# Altium PCB ZR-3922-MB-V1.0.PcbDoc
Units mm, origin at the board's own origin, x right, y up, seen from the top; angles counter-clockwise.
Board outline 65 x 40 mm, 2 copper layers (Top Layer, Bottom Layer); 255 components, 175 nets, 803 pads, 0 vias.
Unrouted connection lines stored in the file: 538.
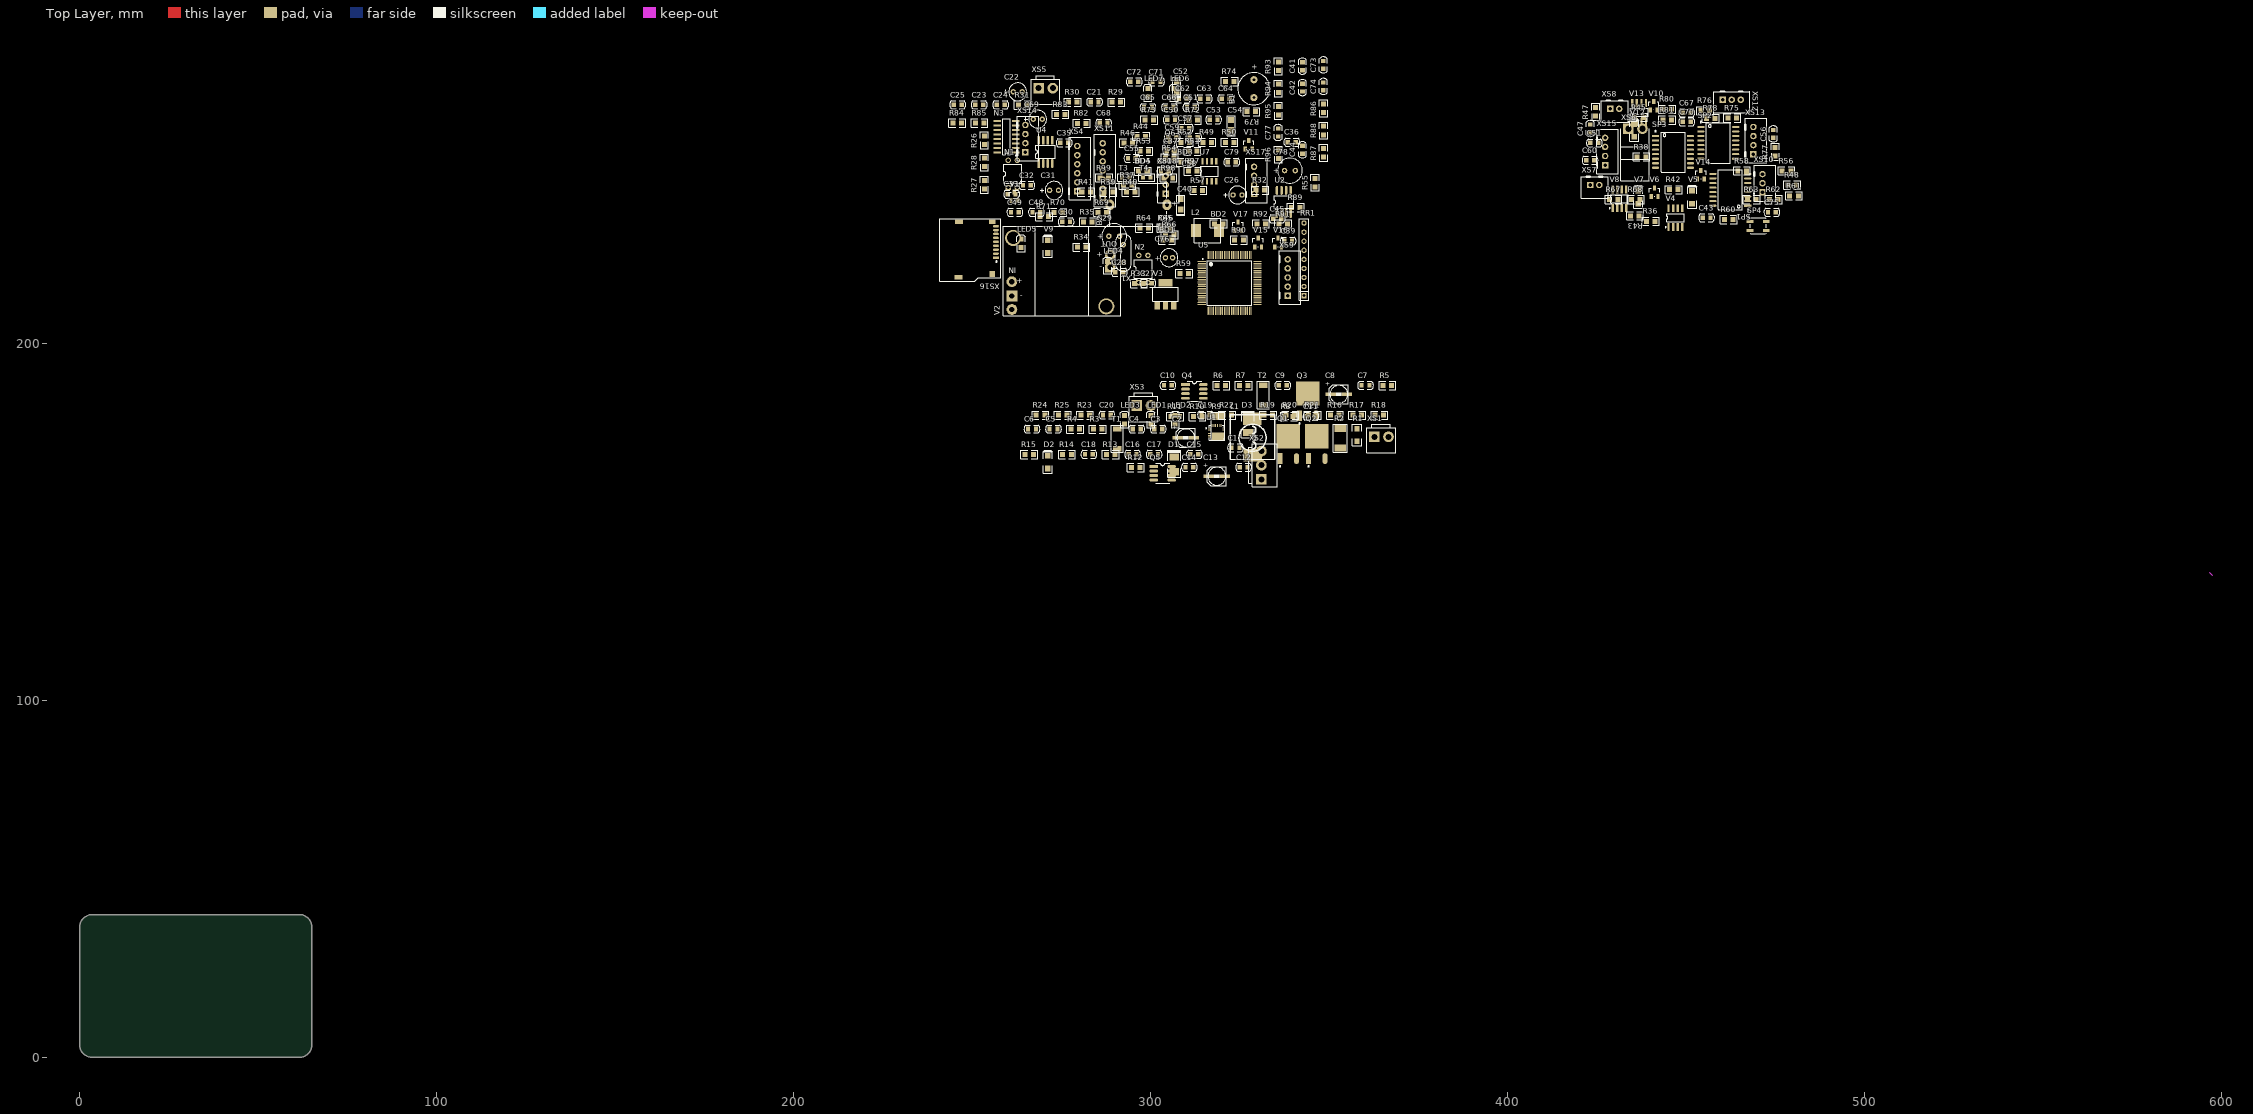
[diagram p0: Top Layer view]
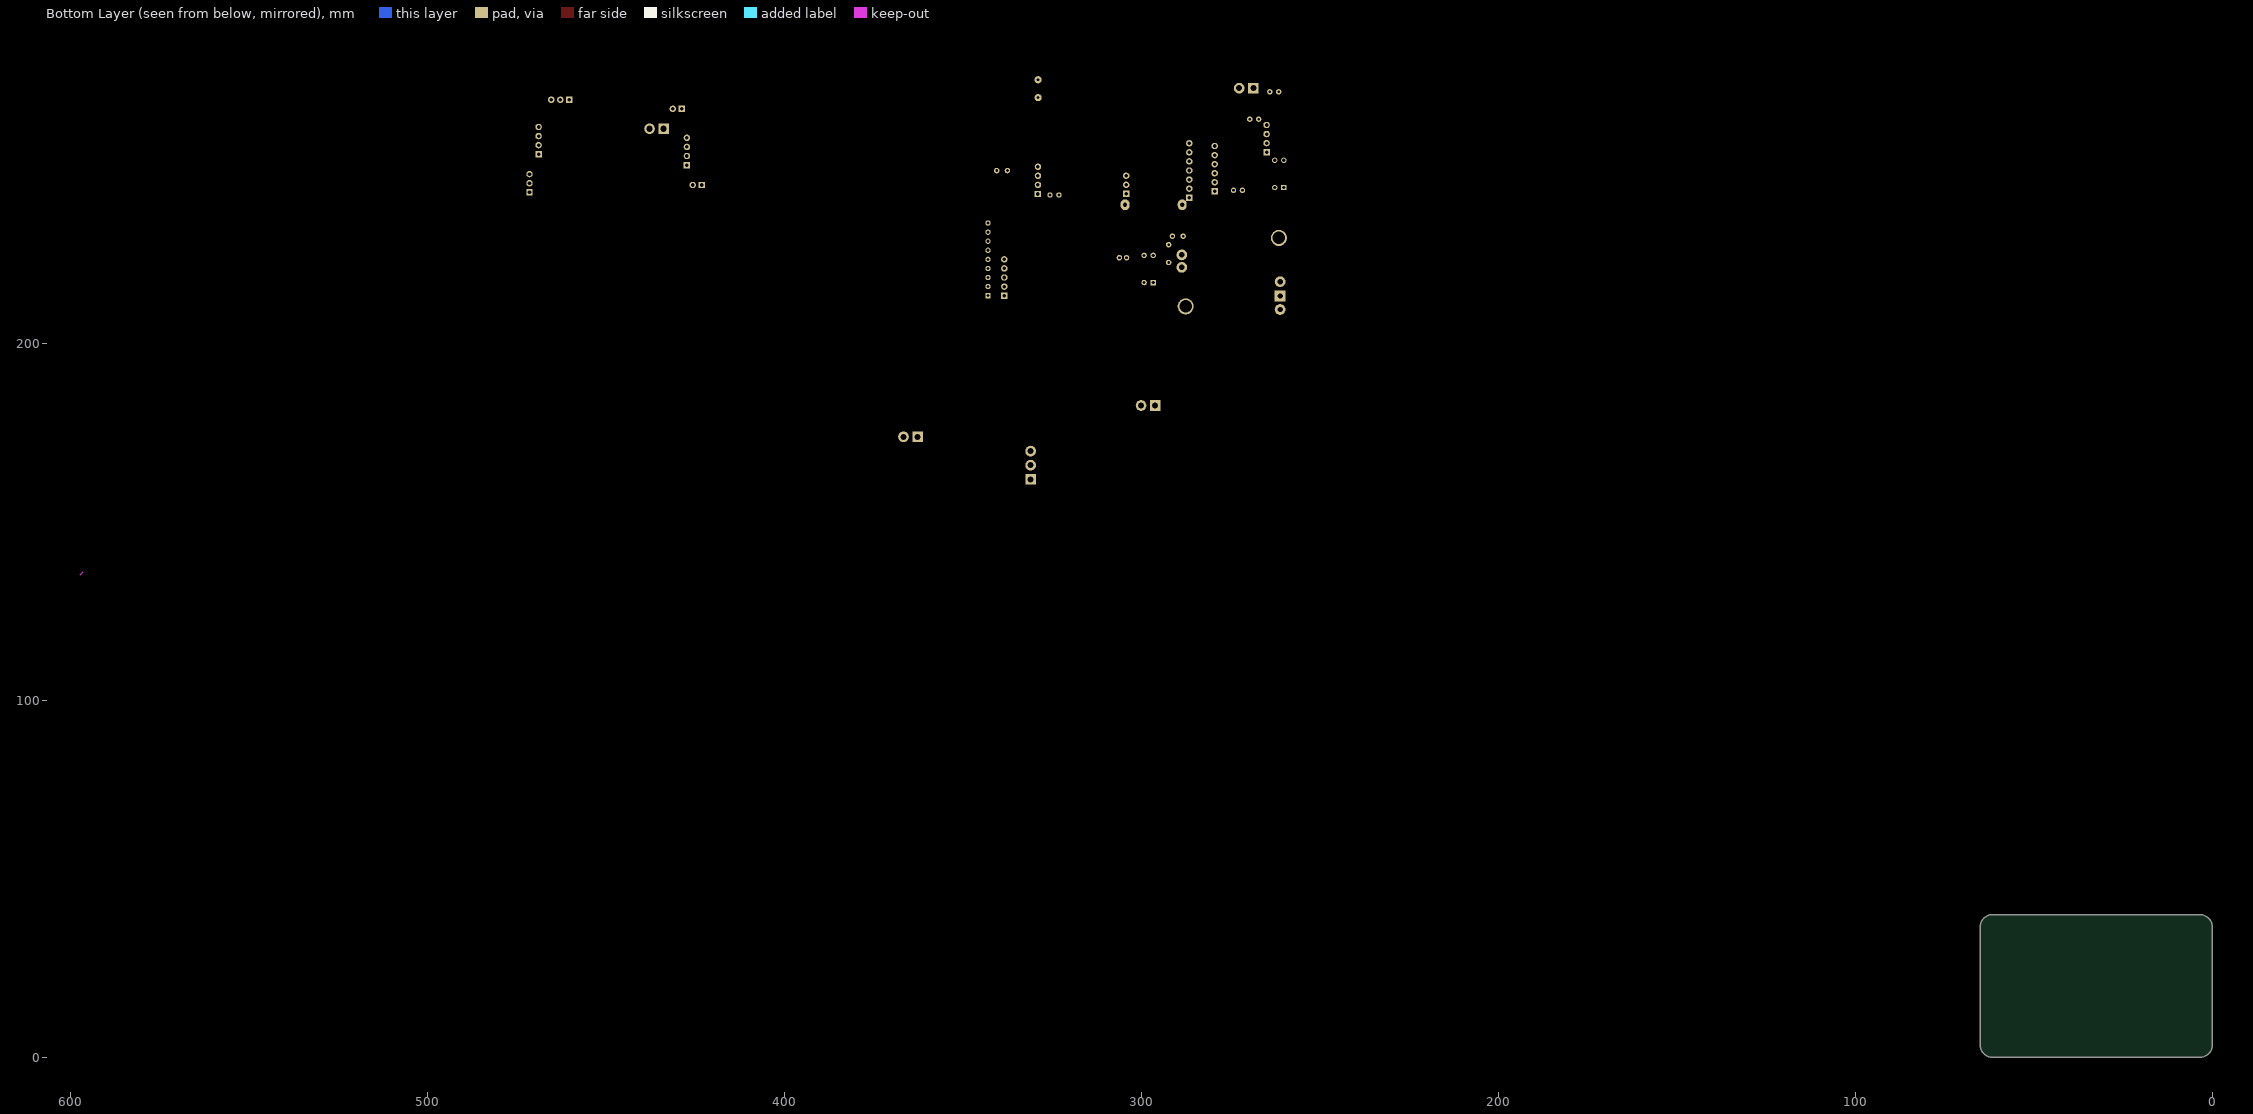
[diagram p1: Bottom Layer view, seen from below]

## Layer stack, top to bottom
Top Layer: signal copper 0.0356
Dielectric: dielectric 0.32, FR-4, Dk 4.8
Bottom Layer: signal copper 0.0356

## Board outline
0,3.5 0,36.5 cw(c3.5,36.5) 3.5,40 61.5,40 cw(c61.5,36.5) 65,36.5 65,3.5 cw(c61.5,3.5) 61.5,0 3.5,0 cw(c3.5,3.5)

## Design rules (kind name [scope] priority, off if disabled: settings)
Clearance Clearance_1 [InPolygon] p1: gap=0.8
Clearance [All] p2: gap=0.2
ComponentClearance [All] p1: gap=0 collisioncheckmode=3 verticalgap=0.254 showdistances=FALSE
HoleSize [All] p1: absolutevalues=TRUE maxlimit=7 minlimit=0.025 maxpercent=80.000 minpercent=20.000
PolygonConnect PolygonConnect_1 [IsVia] p1: connectstyle=Direct reliefconductorwidth=0.254 reliefentries=4 polygonreliefangle="90 Angle"
PolygonConnect [All] p2: connectstyle=Relief reliefconductorwidth=0.5 reliefentries=4 polygonreliefangle="90 Angle"
RoutingVias [All] p1: holewidth=0.711 width=1.27 viastyle="Through Hole" minholewidth=0.711 minwidth=1.27 maxholewidth=0.711 maxwidth=1.27
ShortCircuit [All] p1: allowed=TRUE
SilkToSilkClearance [All] p1: silktosilkclearance=0
SilkscreenOverComponentPads [All] p1: minsilkscreentomaskgap=0
SolderMaskExpansion [All] p1: expansion=0.102
Width [All] p1: maxlimit=3 minlimit=0.254 preferedwidth=0.254
23 further rules are at their usual default settings.

## Classes and differential pairs
component class ZR-3922-MB-V1.0-1: B1 B2 BD1 BD2 BD3 BD4 BD5 C21 C22 C23 C24 C25 C26 C27 C28 C29 C30 C31 C32 C33 C34 C35 C36 C37 C38 C39 C40 C41 C42 C43 C44 C45 C46 C47 C48 C49 C50 C51 C52 C53 C54 C55 C56 C57 C58 C59 C60 C61 C62 C63 C64 C65 C66 C67 C68 C69 C70 C71 C72 C73 C74 C75 C76 C77 C78 C79 C80 L2 LED4 LED5 LED6 LED7 N1 N2 N3 Q6 R26 R27 R28 R29 R30 R31 R32 R33 R34 R35 R36 R37 R38 R39 R40 R41 R42 R43 R44 R45 R46 R47 R48 R49 R50 R51 R52 R53 R54 R55 R56 R57 R58 R59 R60 R61 R62 R63 R64 R65 R66 R67 R68 R69 R70 R71 R72 R73 R74 R75 R76 R77 R78 R79 R80 R81 R82 R83 R84 R85 R86 R87 R88 R89 R90 R91 R92 R93 R94 R95 R96 R97 R98 R99 RR1 SP1 SP2 SP3 SP4 T3 T4 U2 U3 U4 U5 U6 U7 V1 V2 V3 V4 V5 V6 V7 V8 V9 V10 V11 V12 V13 V14 V15 V16 V17 X1 XS4 XS5 XS6 XS7 XS8 XS9 XS10 XS11 XS12 XS13 XS14 XS15 XS16 XS17 XS18
component class ZR-3922-CHARGE-V1.0: 2 3 4 6 7 8 9 C1 C2 C3 C4 C5 C6 C7 C8 C9 C10 C11 C12 C13 C14 C15 C16 C17 C18 C19 C20 C21 D1 D2 D3 L1 LED1 LED2 LED3 Q1 Q2 Q3 Q4 Q5 R1 R2 R3 R4 R5 R6 R7 R8 R9 R10 R11 R12 R13 R14 R15 R16 R17 R18 R19 R20 R21 R22 R23 R24 R25 T1 T2 TP2 TP3 TP4 TP6 TP7 TP8 TP9 U1 XS1 XS2 XS3

## Components (designator, comment, footprint, x,y, rotation, side; value= is the part's Value field where it differs from the comment)
B1 "*" 蜂鸣器-3 328.854,271.323 r90 top
B2 "3.6V电池" 电池-3.6V-30maH 304.495,238.811 r90 top
BD1 "FBMA-11-201209-301A30T" R0805 303.352,228.956 r0 top
BD2 "FBMA-11-201209-301A30T" R0805 317.856,233.477 r0 top
BD3 "FBMA-11-201209-301A30T" R0805 308.458,250.723 r0 top
BD4 "FBMA-11-201209-301A30T" R0805 296.57,248.234 r0 top
BD5 "FBMA-11-201209-301A30T" R0805 296.596,248.234 r0 top
C1 "0.1uF" C0805 322.605,170.764 r0 top
C2 "22uF/50V" 贴片铝电解电容-F5 307.619,173.507 r0 top
C3 "1uF" C0805 300.965,175.997 r0 top
C4 "0.1uF" C0805 294.945,175.997 r0 top
C5 "0.1uF" C0805 271.628,175.997 r0 top
C6 "0.1uF" C0805 265.608,175.997 r0 top
C7 "0.1uF" C0805 359.029,188.214 r0 top
C8 "22uF/50V" 贴片铝电解电容-F5 350.469,185.725 r0 top
C9 "0.1uF" C0805 335.839,188.214 r0 top
C10 "0.1uF" C0805 303.657,188.214 r0 top
C11 "1uF" C0805 343.713,179.553 r0 top
C12 "47nF" C0805 324.891,165.278 r0 top
C13 "22uF/50V" 贴片铝电解电容-F5 316.306,162.789 r0 top
C14 "0.1uF" C0805 309.677,165.278 r0 top
C15 "0.1uF" C0805 311.074,168.91 r0 top
C16 "0.1uF" C0805 293.802,168.91 r0 top
C17 "0.1uF" C0805 299.822,168.91 r0 top
C18 "22pF" C0805 281.534,168.91 r0 top
C19 "0.1uF" C0805 314.198,179.934 r0 top
C20 "1uF" C0805 286.588,179.934 r0 top
C21 "0.1uF" C0805 283.134,267.589 r0 top
C22 "47uF/25V" RB2.5-5 261.468,270.459 r0 top
C23 "0.1uF" C0805 250.825,266.827 r0 top
C24 "0.1uF" C0805 256.845,266.827 r0 top
C25 "10nF" C0805 244.805,266.827 r0 top
C26 "100uF/16V" RB2.5-5 323.037,241.554 r0 top
C27 "0.1uF" C0805 298.069,216.84 r0 top
C28 "0.1uF" C0805 290.043,219.913 r0 top
C29 "100uF/16V" 电容100UF/16V 288.239,230.022 r0 top
C30 "0.1uF" c0805 275.158,234.036 r0 top
C31 "100uF/16V" RB2.5-5 271.628,242.849 r0 top
C32 "0.1uF" C0805 264.16,244.246 r0 top
C33 "3.3nF" C0805 259.893,241.808 r0 top
C35 "0.1uF" C0805 274.625,256.159 r0 top
C36 "0.1uF" C0805 338.379,256.362 r0 top
C37 "0.1uF" C0805 304.47,253.873 r0 top
C39 "0.01uF" C0805 337.363,228.676 r0 top
C40 "10uF/10V" CAP-A(3216) 308.356,238.912 r90 top
C41 "0.1uF" C0805 342.468,276.53 r90 top
C42 "2.2uF" C0805 342.468,270.51 r90 top
C43 "0.1uF" C0805 454.558,235.204 r0 top
C44 "0.1uF" C0805 342.468,253.111 r90 top
C45 "22PF" C0805 334.289,234.874 r0 top
C46 "0.1uF" C0805 303.2,232.385 r0 top
C47 "0.1uF" C0805 423.062,259.08 r90 top
C48 "0.1uF" C0805 266.852,236.728 r0 top
C49 "22PF" C0805 260.833,236.728 r0 top
C50 "0.1uF" C0805 304.571,262.611 r0 top
C51 "0.1uF" C0805 423.113,256.134 r0 top
C52 "1uF/16V" CAP-A(3216) 307.238,271.907 r90 top
C53 "0.01uF" C0805 316.484,262.636 r0 top
C54 "1uF/16V" CAP-A(3216) 322.478,261.137 r90 top
C55 "0.01uF" C0805 293.573,251.841 r0 top
C56 "0.1uF" C0805 474.37,257.556 r90 top
C57 "0.1uF" C0805 308.585,260.248 r0 top
C58 "0.1uF" C0805 310.896,257.759 r0 top
C59 "2.2uF" C0805 304.876,257.759 r0 top
C60 "0.1uF" C0805 421.919,251.282 r0 top
C61 "15pF" C0805 310.134,266.065 r0 top
C62 "15pF" C0805 307.823,268.554 r0 top
C63 "15pF" C0805 313.868,268.554 r0 top
C64 "15pF" C0805 319.888,268.554 r0 top
C65 "15pF" C0805 298.094,266.065 r0 top
C66 "15pF" C0805 304.114,266.065 r0 top
C67 "0.1uF" C0805 448.996,264.566 r0 top
C68 "0.1uF" C0805 285.674,261.696 r0 top
C69 "47uF/25V" RB2.5-5 267.081,262.788 r0 top
C70 "0.1uF" C0805 448.996,262.026 r0 top
C71 "0.1uF" C0805 300.482,273.304 r0 top
C72 "0.1uF" C0805 294.259,273.304 r0 top
C73 "0.1uF" C0805 348.336,276.885 r90 top
C74 "0.1uF" C0805 348.336,270.866 r90 top
C75 "0.1uF" C0805 472.846,236.728 r0 top
C76 "100uF/16V" 电容47UF/25V 304.089,223.977 r0 top
C77 "0.1uF" C0805 335.636,257.962 r90 top
C78 "100uF/16V" 电容100UF/16V 337.464,248.387 r0 top
C79 "0.1uF" C0805 321.564,250.774 r0 top
C80 "0.1uF" C0805 302.819,248.285 r0 top
D1 "SS14" DO-214AC 306.578,164.033 r90 top
D2 "1N4148" IN4148 271.094,166.929 r90 top
D3 "SS14" DO-214AC 327.203,175.057 r90 top
L1 "6.8uH/9A" 贴片电感-F12 328.6,179.095 r0 top
L2 "10uH/3A" 贴片电感-MHC06030 312.115,228.194 r0 top
LED1 "GREEN" 2012 299.974,177.444 r90 top
LED2 "GREEN" 2012 306.832,177.444 r90 top
LED3 "GREEN" 2012 292.608,177.444 r90 top
LED4 "RED" 2012 287.884,220.574 r90 top
LED5 "GREEN" 2012 263.652,226.797 r90 top
LED6 "GREEN" 2012 306.476,268.935 r90 top
LED7 "GREEN" 2012 299.136,268.935 r90 top
N1 "TLP621-1" DIP-4 261.315,247.447 r0 top
N2 "TLP621-1" DIP-4 297.891,220.828 r0 top
N3 "MAX3232ESE" SO-16 259.563,257.886 r90 top
Q1 "IRFR5305" TO-252 336.194,167.716 r0 top
Q2 "IRFR5305" TO-252 344.17,167.716 r0 top
Q3 "IRFR5305" TO-252 341.63,179.705 r0 top
Q4 "FDS8447" SO8 309.702,188.443 r0 top
Q5 "FDS8447" SO8 300.812,165.506 r0 top
Q6 "S8550" 三极管 305.257,256.591 r0 top
R1 "15Ω" 1206 357.734,172.593 r90 top
R2 "0.01Ω" 2512 353.06,176.251 r90 top
R3 "100K" R0805 283.896,175.946 r0 top
R4 "100K" R0805 277.647,175.946 r0 top
R5 "1K" R0805 365.074,188.163 r0 top
R6 "1K" R0805 318.567,188.163 r0 top
R7 "10Ω" R0805 324.79,188.163 r0 top
R8 "9.1K" R0805 337.464,179.502 r0 top
R9 "0.01Ω" 2512 318.795,179.578 r90 top
R10 "0Ω" R0805 311.887,179.502 r0 top
R11 "100Ω" R0805 305.638,179.502 r0 top
R12 "10K" R0805 294.564,165.227 r0 top
R13 "440K" R0805 287.553,168.859 r0 top
R14 "30K" R0805 275.311,168.859 r0 top
R15 "10K" R0805 264.77,168.859 r0 top
R16 "100K" R0805 350.368,179.883 r0 top
R17 "100K" R0805 356.591,179.883 r0 top
R18 "100K" R0805 362.814,179.883 r0 top
R19 "10K" R0805 331.673,179.883 r0 top
R20 "10K" R0805 337.896,179.883 r0 top
R21 "10K" R0805 344.145,179.883 r0 top
R22 "10K" R0805 320.218,179.883 r0 top
R23 "15K" R0805 280.365,179.883 r0 top
R24 "100K" R0805 267.894,179.883 r0 top
R25 "10K" R0805 274.117,179.883 r0 top
R26 "240" R0805 253.34,255.702 r90 top
R27 "100" R0805 253.34,243.23 r90 top
R28 "0Ω" R0805 253.34,249.479 r90 top
R29 "10K" R0805 289.154,267.538 r0 top
R30 "1K" R0805 276.911,267.538 r0 top
R31 "10K" R0805 262.865,266.776 r0 top
R32 "100K" R0805 329.463,242.9 r0 top
R33 "1K" R0805 295.453,216.789 r0 top
R34 "51K" R0805 279.4,226.924 r0 top
R35 "2.7K" R0805 281.178,233.985 r0 top
R36 "10K" R0805 438.81,234.188 r0 top
R37 "6.8K" R0805 292.278,244.297 r0 top
R38 "510" R0805 436.22,252.247 r0 top
R39 "10K" R0805 286.944,242.418 r0 top
R40 "5.1K" R0805 293.167,242.418 r0 top
R41 "6.98K" R0805 280.721,242.418 r0 top
R42 "1K" R0805 445.262,243.053 r0 top
R43 "10K" R0805 436.778,235.712 r180 top
R44 "1K" R0805 296.088,257.988 r0 top
R45 "510" R0805 435.534,263.296 r0 top
R46 "1K" R0805 292.481,256.108 r0 top
R47 "10K" R0805 424.586,263.652 r90 top
R48 "10K" R0805 478.434,244.348 r0 top
R49 "1K" R0805 314.604,256.311 r0 top
R50 "100Ω" R0805 320.853,256.311 r0 top
R51 "4.7K" R0805 310.49,253.822 r0 top
R52 "4.7K" R0805 308.381,256.311 r0 top
R53 "10K" R0805 296.977,253.822 r0 top
R54 "10K" R0805 304.089,251.943 r0 top
R55 "10K" R0805 345.948,243.84 r90 top
R56 "10K" R0805 476.834,248.31 r0 top
R57 "10K" R0805 312.115,242.849 r0 top
R58 "510" R0805 464.388,248.31 r0 top
R59 "10K" R0805 308.127,219.558 r0 top
R60 "10K" R0805 460.654,234.696 r0 top
R61 "10K" R0805 478.942,241.3 r0 top
R62 "5.1K" R0805 473.304,240.284 r0 top
R63 "100" R0805 467.081,240.284 r0 top
R64 "240" R0805 296.951,232.334 r0 top
R65 "10K" R0805 302.997,232.334 r0 top
R66 "1M" R0805 304.063,230.454 r0 top
R67 "5.1K" R0805 428.396,240.284 r0 top
R68 "5.1K" R0805 434.645,240.284 r0 top
R69 "240" R0805 285.14,236.677 r0 top
R70 "240" R0805 272.898,236.677 r0 top
R71 "240" R0805 268.935,235.483 r0 top
R72 "240" R0805 310.617,262.56 r0 top
R73 "240" R0805 298.348,262.56 r0 top
R74 "47" R0805 320.878,273.355 r0 top
R75 "5.1K" R0805 461.67,263.144 r0 top
R76 "100" R0805 454.05,265.176 r0 top
R77 "5.1K" R0805 474.878,252.476 r90 top
R78 "5.1K" R0805 455.6,263.042 r0 top
R79 "100Ω" R0805 329.362,264.871 r180 top
R80 "5.1K" R0805 443.408,265.582 r0 top
R81 "5.1K" R0805 443.408,262.534 r0 top
R82 "1K" R0805 279.451,261.645 r0 top
R83 "1K" R0805 273.507,264.135 r0 top
R84 "10K" R0805 244.602,261.696 r0 top
R85 "10K" R0805 250.825,261.696 r0 top
R86 "0Ω" R0805 348.386,264.643 r90 top
R87 "10K" R0805 348.386,252.171 r90 top
R88 "10K" R0805 348.386,258.42 r90 top
R89 "1K" R0805 339.369,238.023 r0 top
R90 "0Ω" R0805 323.494,228.956 r0 top
R91 "0Ω" R0805 335.89,233.477 r0 top
R92 "0Ω" R0805 329.667,233.477 r0 top
R93 "10K" R0805 335.686,276.428 r90 top
R94 "1K" R0805 335.686,270.205 r90 top
R95 "10K" R0805 335.686,263.982 r90 top
R96 "0Ω" R0805 335.686,251.714 r90 top
R97 "100Ω" R0805 310.566,248.234 r0 top
R98 "220Ω" R0805 303.733,246.355 r0 top
R99 "100Ω" R0805 285.75,246.355 r0 top
RR1 "10K*9" SIP-9 342.9,213.36 r90 top
SP1 "SM9541" SOIC-16(WIDE) 467.182,238.557 r180 top
SP2 "SM9541" SOIC-16(WIDE) 454.05,260.604 r0 top
SP3 "SM9541" SOIC-16(WIDE) 441.35,258.064 r0 top
SP4 "MS5805-02BA01" MS5805-02BA01 467.843,234.112 r0 top
T1 "SMBJ28CA" DO-214AA(SMB)双向 290.601,170.51 r90 top
T2 "SMBJ28CA" DO-214AA(SMB)双向 331.521,182.728 r90 top
T3 "BV05C" T0805 291.922,246.431 r0 top
T4 "BV05C" T0805 297.79,246.431 r0 top
U1 "BQ24610" QFN24 318.414,174.981 r0 top
U2 "MP2303A" SOIC-8 335.331,236.093 r90 top
U4 "FM24CL64" SOIC-8 268.58,250.139 r90 top
U5 "STM32F407VET6" LQFP100-手工 322.072,216.916 r0 top
U7 "MAX3485ESA" SOP-8 316.408,248.209 r0 top
V1 "S8550" 三极管 261.772,242.367 r0 top
V2 "DCDC模块接口" DC/DC模块接口 291.592,207.772 r180 top
V3 "AS1117-3.3" SOT223 304.089,216.967 r0 top
V4 "NDS8435A" SOIC-8N 446.938,235.204 r0 top
V5 "1N4148" IN4148 451.587,241.122 r90 top
V6 "S8050" 三极管 441.071,243.535 r0 top
V7 "FR102" IN4148 436.524,241.122 r90 top
V8 "NDS8435A" SOIC-8N 431.267,240.513 r0 top
V9 "1N4148" IN4148 271.12,227.305 r90 top
V10 "S8050" 三极管 440.842,267.716 r0 top
V11 "S8550" 三极管 327.406,256.794 r0 top
V12 "FR101" IN4148 435.407,259.842 r90 top
V13 "NDS8435A" SOIC-8N 436.753,264.668 r0 top
V14 "S8050" 三极管 454.05,248.412 r0 top
V15 "S8050" 三极管 330.048,229.438 r0 top
V16 "S8050" 三极管 335.636,229.438 r0 top
V17 "S8050" 三极管 324.409,233.959 r0 top
X1 "8M" 石英晶振 292.303,227.635 r270 top
XS1 "VH-2A" VH-2A 362.61,173.812 r0 top
XS2 "VH-3A" VH-3A 330.962,165.862 r90 top
XS3 "VH-2A" VH-2A 296.062,182.601 r0 top
XS4 "TJC3-6A" TJC3-6A 279.4,248.92 r90 top
XS5 "VH-2A" VH-2A 268.58,271.475 r0 top
XS6 "VH-2WA" VH-2WA 433.73,260.096 r0 top
XS7 "TJC3-2A" TJC3-2A 423.062,244.348 r0 top
XS8 "TJC3-2A" TJC3-2A 428.65,265.684 r0 top
XS9 "TJC3-5A" TJC3-5A 338.328,218.44 r90 top
XS10 "HA-3A" TJC3-3A 471.322,242.316 r90 top
XS11 "TJC3-7A" TJC3-7A 286.512,240.792 r90 top
XS12 "HA-3A" TJC3-3A 460.146,268.224 r0 top
XS13 "TJC3-4A" TJC3-4A 468.782,252.984 r90 top
XS14 "HA-4A" TJC3-4A 264.871,253.543 r90 top
XS15 "TJC3-4A" TJC3-4A 427.228,249.936 r90 top
XS16 "TF" MICROSD 256.54,224.028 r180 top
XS17 "HA-4A" TJC3-4A 328.905,241.833 r90 top
XS18 "HA-3A" TJC3-3A 304.19,241.859 r90 top

## Footprints (in the part's own frame and the unit in brackets; to place one, negate y for a bottom-side part, rotate by r counter-clockwise, add the part's x,y. Pads: shape width x height; smd on the part's side, far side on the other; paste and mask are expansions set on the pad)
1206 [mil]
  rect 60x60 smd: 1(0,0) 2(135,0)
  silkscreen extent -50,-50 185,50
2012 [mm]
  rect 1.4x1.4 smd: 1(0,0) 2(2.4,0)
  silkscreen extent -1.15,-1.15 3.6,1.15, body extent 0.2,-0.61 2.24,0.66, height 1.1
2512 [mil]
  rect 80x130 smd: 1(0,0) 2(-220,0)
  silkscreen extent -265,-75 45,75
C0805 [mm]
  rect 1.2x1.3 smd: 1(0,0) 2(2.2,0)
  silkscreen extent -1.15,-1.1 3.35,1.1, body extent -0.48,-0.71 2.52,0.69, height 0.93
c0805 [mm]
  rect 1.2x1.3 smd: 1(0,0) 2(2.2,0)
  silkscreen extent -1.15,-1.1 3.35,1.1, body extent -0.48,-0.71 2.52,0.69, height 0.93
CAP-A(3216) [mm]
  rect 1.7x1.6 smd: 1(-1.46,0) 2(1.46,0)
  silkscreen extent -3,-1.14 2.6,1.14
DC/DC模块接口 [mm]
  round 4.5 hole 3.5: 0(4.069,-2.581) 0(30.198,-21.735)
  rect 3x3 hole 1.5: 1(30.508,-5.5)
  round 3 hole 1.5: 2(30.505,-9.497) 3(3,-13.5) 4(2.997,-17) 5(30.505,-1.702)
  silkscreen extent 0,-25.01 33,0
DIP-4 [mm]
  rect 1.5x1.5 hole 0.9: 1(-1.27,-3.81)
  round 1.5 hole 0.9: 2(1.27,-3.81) 3(1.27,3.81) 4(-1.27,3.81)
  silkscreen extent -2.55,-2.65 2.55,2.65
DO-214AA(SMB)双向 [mm]
  rect 1.5x2.4 smd: 1(5.5,0) 2(0,0)
  silkscreen extent -1.07,-1.65 6.6,1.65
DO-214AC [mm]
  rect 2x2.7 smd: 1(0,0) 2(4.1,0)
  silkscreen extent -1.5,-1.8 5.97,1.9, body extent -0.1,-1.35 4.57,1.3, height 2.25
IN4148 [mm]
  rect 1.6x1.6 smd: 1(-2,0) 2(1.6,0)
  silkscreen extent -3.25,-1.25 3.1,1.25
LQFP100-手工 [mm]
  oval 2.3x0.3 smd: 1(-7.8,6) 2(-7.8,5.5) 3(-7.8,5) 4(-7.8,4.5) 5(-7.8,4) 6(-7.8,3.5) 7(-7.8,3) 8(-7.8,2.5) 9(-7.8,2) 10(-7.8,1.5) 11(-7.8,1) 12(-7.8,0.5) 13(-7.8,0) 14(-7.8,-0.5) 15(-7.8,-1) 16(-7.8,-1.5) 17(-7.8,-2) 18(-7.8,-2.5) 19(-7.8,-3) 20(-7.8,-3.5) 21(-7.8,-4) 22(-7.8,-4.5) 23(-7.8,-5) 24(-7.8,-5.5) 25(-7.8,-6) 51(7.8,-6) 52(7.8,-5.5) 53(7.8,-5) 54(7.8,-4.5) 55(7.8,-4) 56(7.8,-3.5) 57(7.8,-3) 58(7.8,-2.5) 59(7.8,-2) 60(7.8,-1.5) 61(7.8,-1) 62(7.8,-0.5) 63(7.8,0) 64(7.8,0.5) 65(7.8,1) 66(7.8,1.5) 67(7.8,2) 68(7.8,2.5) 69(7.8,3) 70(7.8,3.5) 71(7.8,4) 72(7.8,4.5) 73(7.8,5) 74(7.8,5.5) 75(7.8,6)
  oval 0.3x2.3 smd: 26(-6,-7.8) 27(-5.5,-7.8) 28(-5,-7.8) 29(-4.5,-7.8) 30(-4,-7.8) 31(-3.5,-7.8) 32(-3,-7.8) 33(-2.5,-7.8) 34(-2,-7.8) 35(-1.5,-7.8) 36(-1,-7.8) 37(-0.5,-7.8) 38(0,-7.8) 39(0.5,-7.8) 40(1,-7.8) 41(1.5,-7.8) 42(2,-7.8) 43(2.5,-7.8) 44(3,-7.8) 45(3.5,-7.8) 46(4,-7.8) 47(4.5,-7.8) 48(5,-7.8) 49(5.5,-7.8) 50(6,-7.8) 76(6,7.8) 77(5.5,7.8) 78(5,7.8) 79(4.5,7.8) 80(4,7.8) 81(3.5,7.8) 82(3,7.8) 83(2.5,7.8) 84(2,7.8) 85(1.5,7.8) 86(1,7.8) 87(0.5,7.8) 88(0,7.8) 89(-0.5,7.8) 90(-1,7.8) 91(-1.5,7.8) 92(-2,7.8) 93(-2.5,7.8) 94(-3,7.8) 95(-3.5,7.8) 96(-4,7.8) 97(-4.5,7.8) 98(-5,7.8) 99(-5.5,7.8) 100(-6,7.8)
  silkscreen extent -7.67,-6.25 6.25,6.82, body extent -7.97,-8.03 8.03,7.97, height 1.6
MICROSD [mm]
  rect 1.5x1.6 smd: 0(0.924,4.6)
  rect 1.8x1.2 smd: 0(1.024,-10.051)
  rect 2.2x1.2 smd: 0(10.324,-10) 0(10.424,5.5)
  round 0 hole 1: 0(10.424,0.8) 0(10.424,-7.2)
  rect 1.6x0.7 smd: 1(-0.076,0)
  oval 1.6x0.7 smd: 2(-0.076,-1.1) 3(-0.076,-2.2) 4(-0.076,-3.3) 5(-0.076,-4.4) 6(-0.076,-5.5) 7(-0.076,-6.6) 8(-0.076,-7.7) 9(-0.076,-8.8)
  silkscreen extent -1.38,-10.9 15.62,6.6
MS5805-02BA01 [mm]
  rect 1.9x0.9 smd: 1(0.008,0) 2(0.008,-2.54) 3(4.508,-2.54) 4(4.508,0)
  silkscreen extent -0.61,-3.48 4.5,1.45
QFN24 [mm] "QFN, 24-Leads, Body 4.2x4.2mm (max), Pitch 0.50mm, IPC Medium Density"
  oval 0.8x0.25 smd: 1(-2,1.25) 2(-2,0.75) 3(-2,0.25) 4(-2,-0.25) 5(-2,-0.75) 6(-2,-1.25) 13(2,-1.25) 14(2,-0.75) 15(2,-0.25) 16(2,0.25) 17(2,0.75) 18(2,1.25)
  oval 0.25x0.8 smd: 7(-1.25,-2) 8(-0.75,-2) 9(-0.25,-2) 10(0.25,-2) 11(0.75,-2) 12(1.25,-2) 19(1.25,2) 20(0.75,2) 21(0.25,2) 22(-0.25,2) 23(-0.75,2) 24(-1.25,2)
  silkscreen extent -3.07,-2.1 2.1,2.1, body extent -2.08,-2.07 2.07,2.08, height 1
R0805 [mm]
  rect 1.4x1.4 smd: 1(0,0) 2(2.4,0)
  silkscreen extent -1.15,-1.15 3.55,1.15, body extent 0.32,-0.7 2.32,0.56, height 0.55
RB2.5-5 [mil]
  round 60 hole 30: 1(0,0) 2(98.43,0)
  silkscreen extent -102,-98 148,98
SIP-9 [mm]
  rect 1.5x1.5 hole 0.9: 1(0,0)
  round 1.5 hole 0.9: 2(2.54,0) 3(5.08,0) 4(7.62,0) 5(10.16,0) 6(12.7,0) 7(15.24,0) 8(17.78,0) 9(20.32,0)
  silkscreen extent -1.27,-1.27 21.59,1.27
SO8 [mm]
  rect 2.4x0.8 smd: 1(0,0)
  oval 2.4x0.8 smd: 2(0,-1.27) 3(0,-2.54) 4(0,-3.81) 5(5,-3.81) 6(5,-2.54) 7(5,-1.27) 8(5,0)
  silkscreen extent 0.5,-4.7 4.5,0.89, body extent -0.51,-4.42 5.49,0.48, height 1.7
SO-16 [mm]
  rect 0.55x2.2 smd: 1(-4.445,-2.6) 2(-3.175,-2.6) 3(-1.905,-2.6) 4(-0.635,-2.6) 5(0.635,-2.6) 6(1.905,-2.6) 7(3.175,-2.6) 8(4.445,-2.6) 9(4.445,2.6) 10(3.175,2.6) 11(1.905,2.6) 12(0.635,2.6) 13(-0.635,2.6) 14(-1.905,2.6) 15(-3.175,2.6) 16(-4.445,2.6)
  silkscreen extent -5.39,-2.72 5,1.1, body extent -5.03,-3.18 4.97,3.09, height 1.5
SOIC-8 [mm]
  rect 2.5x0.7 smd: 1(0.254,0)
  oval 2.5x0.7 smd: 2(0.254,-1.27) 3(0.254,-2.54) 4(0.254,-3.81) 5(6.746,-3.81) 6(6.746,-2.54) 7(6.746,-1.27) 8(6.746,0)
  silkscreen extent 1.7,-4.64 5.3,0.83, body extent 0.35,-4.39 6.35,0.51, height 1.7
SOIC-8N [mm]
  rect 0.6x2.2 smd: 1(-1.905,-2.625) 2(-0.635,-2.625) 3(0.635,-2.625) 4(1.905,-2.625) 5(1.905,2.625) 6(0.635,2.625) 7(-0.635,2.625) 8(-1.905,2.625)
  silkscreen extent -2.88,-2.79 2.5,1.13
SOIC-16(WIDE) [mm]
  rect 2x0.6 smd: 1(0,0)
  oval 2x0.6 smd: 2(0,-1.27) 3(0,-2.54) 4(0,-3.81) 5(0,-5.08) 6(0,-6.35) 7(0,-7.62) 8(0,-8.89) 9(9.765,-8.89) 10(9.765,-7.62) 11(9.765,-6.35) 12(9.765,-5.08) 13(9.765,-3.81) 14(9.765,-2.54) 15(9.765,-1.27) 16(9.765,0)
  silkscreen extent -0.23,-10.11 8.31,1.56, body extent 0.89,-10.16 8.89,1.27, height 5
SOP-8 [mm]
  rect 0.6x1.85 smd: 1(-1.905,-2.775) 2(-0.635,-2.775) 3(0.635,-2.775) 4(1.905,-2.775) 5(1.905,2.775) 6(0.635,2.775) 7(-0.635,2.775) 8(-1.905,2.775)
  silkscreen extent -2.88,-2.9 2.5,1.45
SOT223 [mil]
  rect 59x79 smd: 1(-89.88,-253.54) 2(0.67,-253.54) 3(91.22,-253.54)
  rect 150x79 smd: 2(0,0)
  silkscreen extent -139,-202 141,-52, body extent -128,-270 128,6, height 63
T0805 [mm]
  rect 1.2x1.2 smd: 1(0,0) 2(2.14,0)
  silkscreen extent -1.13,-1.1 3.27,1.1
TJC3-2A [mm]
  rect 1.8x1.8 hole 1: 1(0,0)
  round 1.8 hole 1: 2(2.54,0)
  silkscreen extent -2.5,-3.7 5,2.3
TJC3-3A [mm]
  rect 1.8x1.8 hole 1: 1(0,0)
  round 1.8 hole 1: 2(2.54,0) 3(5.08,0)
  silkscreen extent -2.46,-3.7 7.54,2.35
TJC3-4A [mm]
  rect 1.8x1.8 hole 1: 1(0,0)
  round 1.8 hole 1: 2(2.54,0) 3(5.08,0) 4(7.62,0)
  silkscreen extent -2.45,-3.7 10.05,2.3
TJC3-5A [mm]
  rect 1.8x1.8 hole 1: 1(-5.08,0)
  round 1.8 hole 1: 2(-2.54,0) 3(0,0) 4(2.54,0) 5(5.08,0)
  silkscreen extent -7.51,-3.7 7.49,2.3
TJC3-6A [mm]
  rect 1.8x1.8 hole 1: 1(-6.355,0)
  round 1.8 hole 1: 2(-3.815,0) 3(-1.275,0) 4(1.265,0) 5(3.805,0) 6(6.345,0)
  silkscreen extent -8.72,-3.7 8.78,2.3
TJC3-7A [mm]
  rect 1.8x1.8 hole 1: 1(0,0)
  round 1.8 hole 1: 2(2.54,0) 3(5.08,0) 4(7.62,0) 5(10.16,0) 6(12.7,0) 7(15.24,0)
  silkscreen extent -2.57,-3.7 17.73,2.3
TO-252 [mm]
  rect 1.4x3 smd: 1(0,0)
  rect 6.5x6.8 smd: 2(2.3,6.25)
  oval 1.4x3 smd: 3(4.6,0)
  silkscreen extent -0.18,-2.34 0.18,-1.98
VH-2A [mm]
  rect 3x3 hole 1.7: 1(0,0)
  round 3 hole 1.7: 2(3.96,0)
  silkscreen extent -2.07,-4.5 5.92,3.52
VH-2WA [mm]
  rect 3x3 hole 1.7: 1(0,0)
  round 3 hole 1.7: 2(3.96,0)
  silkscreen extent -2.07,-14.5 5.92,-0.02
VH-3A [mm]
  rect 3x3 hole 1.7: 1(-3.96,0)
  round 3 hole 1.7: 2(0,0) 3(3.96,0)
  silkscreen extent -6,-4.5 6,3.5
三极管 [mil]
  rect 36x55.12 smd: B(-37,-94.49) C(0,0) E(38,-94.49)
  silkscreen extent -57,-92 58,-2, body extent -52,-104 62,6, height 47
电容47UF/25V [mil]
  round 60 hole 30: 1(0,0) 2(78.74,0)
  silkscreen extent -59,-98 138,98, body extent -53,-103 199,149, height 465
电容100UF/16V [mil]
  round 60 hole 30: 1(0,0) 2(118.11,0)
  silkscreen extent -79,-138 197,138, body extent -88,-143 164,109, height 465
电池-3.6V-30maH [mm]
  oval 3x2.524 hole 1.2: 1(0,0) 2(0,16)
  silkscreen extent -6,0 6,16
石英晶振 [mil]
  round 60 hole 30: 1(0,0) 2(196.85,0)
  silkscreen extent -117,-89 295,89, body extent -128,-90 312,95, height 145
蜂鸣器-3 [mm]
  round 2 hole 0.82: 1(2.5,0) 2(-2.5,0)
  silkscreen extent -4.5,-4.5 4.5,4.5
贴片电感-F12 [mm]
  rect 5.2x3.5 smd: 1(-0.203,-0.152) 2(-0.076,-10.465)
  silkscreen extent -6.37,-11.62 6.13,0.88
贴片电感-MHC06030 [mm]
  rect 2.8x3.6 smd: 1(0.475,3.4) 2(6.925,3.4)
  silkscreen extent 0,0 7.4,6.8
贴片铝电解电容-F5 [mm]
  rect 3x1 smd: 1(-0.05,-0.003) 2(4.426,-0.003)
  silkscreen extent -0.46,-2.66 4.84,2.65

## Part data
B1: library part 蜂鸣器
B2: library part BATTERY
BD1 BD2 BD3 BD4 BD5: library part 磁珠
C1 C3 C4 C5 C6 C7 C9 C10 C11 C12 C14 C15 C16 C17 C18 C19 C20 C21 C23 C24 C25 C27 C28 C32 C33 C35 C36 C37 C39 C41 C42 C43 C44 C45 C46 C48 C49 C50 C51 C53 C55 C57 C58 C59 C61 C62 C63 C64 C65 C66 C71 C72 C73 C74 C77 C79 C80: library part Cap
C2 C8 C13 C40 C52 C54: library part 钽电容10uF/16V
C22 C26 C29 C31 C69 C76 C78: library part C
C30 C47 C56 C60 C67 C68 C70 C75: library part CAP
D1 D3: library part "D ZENER", "稳压二极管"
L1 L2: library part INDUCTOR
LED1 LED2 LED3 LED4 LED5 LED6 LED7: library part LED
N1 N2: library part TLP521
N3: library part MAX3232
Q1 Q2 Q3: library part MOSFET-P, "P沟道场效应管"
Q4 Q5: library part NDS8435A, "P沟道场效应管"
R1 R2 R3 R4 R5 R6 R7 R8 R9 R10 R11 R12 R13 R14 R15 R16 R17 R18 R19 R20 R21 R22 R23 R24 R25 R26 R27 R28 R29 R30 R31 R32 R33 R34 R35 R36 R37 R38 R39 R40 R41 R42 R43 R44 R45 R46 R47 R48 R49 R50 R51 R52 R53 R54 R55 R56 R57 R58 R59 R60 R61 R62 R63 R64 R65 R66 R67 R68 R69 R70 R71 R72 R73 R74 R75 R76 R77 R78 R79 R80 R81 R82 R83 R84 R85 R86 R87 R88 R89 R90 R91 R92 R93 R94 R95 R96 R97 R98 R99: library part RES
RR1: "排阻-9"
SP1 SP2 SP3: "压力传感器"
T1 T2: library part TVS-B
T3 T4: library part TVS
U1: "1~6节锂电池充电芯片"
U4: library part FM24C64
U5: library part STM32
U7: library part MAX3463
V3: library part AS117
V7 V12: library part 1N4148
X1: library part 石英晶振
XS6: library part VH-2A
XS10 XS12 XS18: library part TJC3-3A
XS11: library part VH-7A
XS14 XS17: library part TJC3-4A
XS16: library part SD-M, "迷你SD卡座"

## Nets (pads, with @x,y where several pads share a name; then routed paths per layer and width w, separated by ;. In a path a pad name is that pad's centre, name@x,y a point inside that pad or via, vN(x,y) a via of type N, cw(c..) or ccw(c..) an arc to the next point about the centre after c; other vN are vias at no path point)
485_RX6: U5.58 U7.1
485_SET: U5.59 U7.2 U7.3
485_TX6: U5.57 U7.4
+3.3V: C29.1 C30.2 C36.2 C39.1 C40.1 C41.1 C44.1 C46.2 C47.1 C50.1 C52.1 C53.1 C56.1 C57.1 C58.2 C60.2 C67.1 C68.1 C70.2 C72.2 C74.2 C75.2 C80.1 N3.16 Q6.E R29.2 R33.1 R51.1 R52.1 R57.2 R59.2 R65.1 R67.2 R68.2 R74.1 R77.2 R78.2 R80.2 R81.2 R82.1 R83.1 R84.2 R85.2 R87.2 R88.2 R93.2 R95.2 R99.2 RR1.1 SP1.7 SP2.7 SP3.7 SP4.1 U4.8 U5.6 U5.11 U5.19 U5.21 U5.28 U5.50 U5.75 U5.100 U7.8 V1.E V3.2 V11.E XS9.1 XS13.1 XS15.1 XS16.4
+5V: BD3.1 C31.1 C32.1 C43.1 C51.1 C78.1 C79.2 D2.2 L2.2 R34.1 R40.2 R53.1 R54.1 R62.2 R75.2 V3.3 XS10.3 XS12.3
+12V: C21.1 C26.1 C27.2 C69.1 C76.1 R32.1 R43.2 R56.2 U2.2 V2.4 V8.1 V8.2 V8.3 V13.1 V13.2 V13.3 XS14.1
+25.2VIN: C5.2 C8.1 Q1.2 R19.1 R20.1 R21.1 R39.2 T2.1 XS2.1
A2: R98.1 R99.1 U7.6 XS18.2
A_JY_SCLK: U5.39 XS13.2
A_JY_SDA: U5.40 XS13.3
A_LY_SDA: R78.1 SP2.10 U5.67
ACSET: R16.2 R24.1 U1.16
B2: R97.2 R98.2 U7.7 XS18.1
B_JY_SCLK: U5.37 XS15.2
B_JY_SDA: U5.38 XS15.3
B_LY_SDA: R81.1 SP3.10 U5.66
BACK1: R73.2 U5.86
BACK2: R72.2 U5.87
BACK3: R71.2 U5.88
BACK4: R70.2 U5.89
BACK5: R69.2 U5.90
BACK6: R64.2 U5.91
BAT_V: C19.1 D2.1 R15.1 U5.25
BEEP: R49.1 U5.79
BTST: C10.2 D3.2 R7.2
FAN: R30.1 U5.44
FAN_5V: N1.4 XS4.1
G_POWKEY: R94.2 U5.32
G_RELOAD: U5.36
G_RESET: U5.35
G_RX1: U5.33
G_TX1: U5.34
GND: B1.2 B2.2 C1.1 C2.2 C3.1 C5.1 C8.2 C9.1 C11.2 C12.1 C13.2 C14.2 C15.2 C16.1 C19.2 C20.2 C21.2 C26.2 C27.1 C28.2 C29.2 C30.1 C31.2 C32.2 C35.2 C36.1 C37.1 C39.2 C40.2 C41.2 C42.2 C43.2 C44.2 C45.2 C46.1 C47.2 C48.2 C49.2 C50.2 C51.2 C52.2 C53.2 C54.2 C55.1 C56.2 C57.2 C58.1 C59.2 C60.1 C61.2 C62.2 C63.2 C64.2 C65.2 C66.2 C67.2 C68.2 C69.2 C70.1 C72.1 C75.1 C76.2 C77.2 C78.2 C79.1 C80.2 D1.1 LED4.2 LED5.2 N1.2 N2.2 N2.3 N3.15 Q5.1 Q5.2 Q5.3 R12.1 R22.1 R23.2 R24.2 R25.2 R37.1 R41.2 R48.2 R55.1 R61.2 R79.2 R97.1 SP1.6 SP2.6 SP3.6 SP4.4 T1.1 T2.2 T3.1 T4.1 U1.17 U2.4 U4.1 U4.2 U4.3 U4.4 U4.7 U5.10 U5.20 U5.27 U5.74 U5.99 U7.5 V2.1 V2.3 V3.1 V6.E V7.1 V10.E V12.1 V14.E V15.E V16.E V17.E XS2.3 XS3.2 XS5.2 XS6.2 XS7.2 XS8.2 XS9.5 XS10.1 XS12.1 XS13.4 XS14.2 XS15.4 XS16.6 XS17.4 XS18.3
GND_FAN: C22.2 C23.2 C24.2 R31.1 XS4.3 XS4.5
HEAT: R42.2 U5.45
I2C0_SCL: R51.2 U4.6 U5.84
I2C0_SDA: R52.2 U4.5 U5.83
ISET1: R18.2 R23.1 U1.11
ISET2: R17.2 R25.1 U1.15
LCD_RX6: N3.12 R87.1 U5.60
LCD_TX6: N3.11 R88.1 U5.61
LY_SCLK: R67.1 R77.1 R80.1 SP1.11 SP2.11 SP3.11 U5.64
NetB1_1: B1.1 V11.C
NetB2_1: B2.1 C37.2 R50.2
NetBD1_1: BD1.1 N3.14
NetBD1_2: BD1.2 XS14.4
NetBD2_1: BD2.1 N3.13
NetBD2_2: BD2.2 XS14.3
NetBD3_2: BD3.2 XS17.1
NetBD4_2: BD4.2 T4.2 XS17.2
NetBD5_2: BD5.2 T3.2 XS17.3
NetC3_2: C3.2 R1.2 U1.24
NetC4_1: C4.1 Q1.1 Q2.1 R3.2 R6.1
NetC4_2: C4.2 Q1.3 Q2.3 R1.1 R3.1
NetC6_1: C6.1 Q3.1 R4.2 R5.2
NetC7_1: C7.1 C9.2 Q2.2 R2.1 U1.2
NetC10_1: C10.1 D1.2 L1.1 Q4.1 Q4.2 Q4.3 Q5.5 Q5.6 Q5.7 Q5.8 U1.20
NetC12_2: C12.2 U1.7
NetC13_1: C13.1 C14.1 C17.1 C18.1 Q3.2 R9.2 R13.2 U1.13 XS3.1
NetC15_1: C15.1 R11.2 U1.6
NetC16_2: C16.2 C17.2 L1.2 R9.1 U1.14
NetC18_2: C18.2 R13.1 R14.2 U1.12
NetC22_1: C22.1 C23.1 R27.2 R28.1
NetC24_1: C24.1 R28.2 XS4.2
NetC25_1: C25.1 U2.1
NetC25_2: C25.2 L2.1 U2.3
NetC28_1: C28.1 U2.8
NetC33_1: C33.1 U2.6
NetC33_2: C33.2 R41.1
NetC34_1: V7.2 V8.5 V8.6 V8.7 V8.8 XS7.1
NetC35_1: C35.1 V9.2
NetC38_1: V12.2 V13.5 V13.6 V13.7 V13.8 XS8.1
NetC42_1: C42.1 U5.73
NetC45_1: C45.1 R66.2 U5.12 X1.2
NetC49_1: C49.1 R66.1 U5.13 X1.1
NetC54_1: C54.1 C55.2 R74.2 U5.22
NetC59_1: C59.1 U5.49
NetC61_1: C61.1 R64.1 RR1.7 XS11.7
NetC62_1: C62.1 R70.1 RR1.5 XS11.5
NetC63_1: C63.1 R71.1 RR1.4 XS11.4
NetC64_1: C64.1 R72.1 RR1.3 XS11.3
NetC65_1: C65.1 RR1.6
NetC66_1: C66.1 R73.1 RR1.2 XS11.2
NetC71_1: C71.1 N3.3
NetC71_2: C71.2 N3.1
NetC73_1: C73.1 N3.5
NetC73_2: C73.2 N3.4
NetC74_1: C74.1 N3.2
NetC77_1: C77.1 N3.6
NetLED1_1: LED1.1 R19.2
NetLED2_1: LED2.1 R20.2
NetLED3_1: LED3.1 R21.2
NetLED4_1: LED4.1 R33.2
NetLED5_1: LED5.1 R44.2
NetLED6_1: LED6.1 R83.2
NetLED6_2: LED6.2 V16.C
NetLED7_1: LED7.1 R82.2
NetLED7_2: LED7.2 V15.C
NetN1_1: N1.1 R26.2
NetN1_3: N1.3 R27.1 R31.2
NetN2_1: N2.1 R39.1
NetQ4_4: Q4.4 R10.2
NetQ5_4: Q5.4 U1.19
NetQ6_B: Q6.B R46.2
NetQ6_C: Q6.C R44.1
NetR5_1: R5.1 U1.23
NetR6_2: R6.2 U1.3
NetR7_1: R7.1 U1.22
NetR8_1: R8.1 R11.1 R12.2
NetR10_1: R10.1 U1.21
NetR14_1: R14.1 R15.2 R22.2
NetR26_1: R26.1 V1.C
NetR29_1: R29.1 R30.2 V1.B
NetR32_2: R32.2 U2.7
NetR34_2: R34.2 R35.2 U2.5
NetR35_1: R35.1 R37.2
NetR36_1: R36.1 R38.2 V4.4
NetR38_1: R38.1 V6.C
NetR42_1: R42.1 V5.1
NetR43_1: R43.1 R45.1 V8.4
NetR45_2: R45.2 V10.C
NetR47_1: R47.1 R48.1 V10.B
NetR49_2: R49.2 V11.B
NetR50_1: R50.1
NetR55_2: R55.2 U5.94
NetR56_1: R56.1 R58.1 V13.4
NetR57_1: R57.1 XS9.2
NetR58_2: R58.2 V14.C
NetR59_1: R59.1 XS9.3
NetR60_1: R60.1 R61.1 V14.B
NetR62_1: R62.1 R63.2 XS10.2
NetR69_1: R69.1 XS11.6
NetR75_1: R75.1 R76.2 XS12.2
NetR79_1: R79.1 XS11.1
NetR84_1: R84.1 R86.1 XS16.2
NetR85_1: R85.1 XS16.1
NetR89_1: R89.1 V15.B
NetR89_2: R89.2
NetR90_1: R90.1 XS16.3
NetR91_1: R91.1 XS16.5
NetR92_1: R92.1 XS16.7
NetR93_1: R93.1 XS16.8
NetR94_1: R94.1 V17.B
NetR95_1: R95.1 R96.1 XS16.9
NetU6_10: V17.C
NetU6_15: V16.B
NetV4_5: V4.5 V4.6 V4.7 V4.8 XS6.1
NetV5_2: V5.2 V6.B
NRST: C48.1 R65.2 U5.14 XS9.4
OK: R46.1 U5.78
PA13_JTMS: U5.72
PA14_JTCK: U5.76
PG: LED1.2 U1.8
POWER_TEST: N2.4 R40.1 U5.30
PUMP_A: R47.2 U5.47
PUMP_B: R60.2 U5.46
QY_SCLK: SP4.2 U5.62
QY_SDA: SP4.3 U5.63
REGN: C20.1 D3.1 U1.18
SD_CD: R96.2 U5.55
SD_CS: R86.2 U5.54
SD_MISO: R92.2 U5.51
SD_MOSI: R90.2 U5.53
SD_SCK: R91.2 U5.52
STAT1: LED3.2 U1.5
STAT2: LED2.2 U1.9
T_SCL: R53.2 U5.82
T_SDA: R54.2 U5.81
TEMP-BOX: R76.1 U5.42
TEMP-H: R63.1 U5.41
TSP_LY_SDA: R68.1 SP1.10 U5.65
USB_D+: BD5.1 U5.71
USB_D-: BD4.1 U5.70
VCC: C1.2 C2.1 C6.2 C7.2 Q3.3 Q4.5 Q4.6 Q4.7 Q4.8 R2.2 R4.1 R36.2 T1.2 U1.1 V2.2 V4.1 V4.2 V4.3 XS1.1 XS1.2 XS5.1
VREF: C11.1 R8.2 R16.1 R17.1 R18.1 U1.4 U1.10
pads on no net: N3.7 N3.8 N3.9 N3.10 RR1.8 RR1.9 SP1.1 SP1.2 SP1.3 SP1.4 SP1.5 SP1.8 SP1.9 SP1.12 SP1.13 SP1.14 SP1.15 SP1.16 SP2.1 SP2.2 SP2.3 SP2.4 SP2.5 SP2.8 SP2.9 SP2.12 SP2.13 SP2.14 SP2.15 SP2.16 SP3.1 SP3.2 SP3.3 SP3.4 SP3.5 SP3.8 SP3.9 SP3.12 SP3.13 SP3.14 SP3.15 SP3.16 U5.1 U5.2 U5.3 U5.4 U5.5 U5.7 U5.8 U5.9 U5.15 U5.16 U5.17 U5.18 U5.23 U5.24 U5.26 U5.29 U5.31 U5.43 U5.48 U5.56 U5.68 U5.69 U5.77 U5.80 U5.85 U5.92 U5.93 U5.95 U5.96 U5.97 U5.98 V2.0 V2.5 V9.1 XS2.2 XS4.4 XS4.6 XS16.0

## Keep-outs
Keep-Out Layer:
  lines w0.3: 596.468,135.865 597.281,135.052

## Text inside footprints (layer, text, board x,y; h text height)
B1: Top Overlay "+" at 329.629,276.498 h1.52 r90
B2: Top Overlay "+" at 307.195,238.311 h1.52 r90
C2: Top Overlay "+" at 305.968,175.971 h1.2
C8: Top Overlay "+" at 348.818,188.189 h1.2
C13: Top Overlay "+" at 314.655,165.252 h1.2
C29: Top Overlay "+" at 285.039,229.247 h1.52
C76: Top Overlay "+" at 301.114,223.152 h1.52
C78: Top Overlay "+" at 334.264,247.612 h1.52
V2: Top Overlay "-" at 286.403,222.059 h1.52 r180; Top Overlay "+" at 286.466,225.56 h1.52 r180; Top Overlay "+" at 264.119,218.123 h1.52 r180; Top Overlay "-" at 264.132,214.071 h1.52 r180; Top Overlay "OUT" at 290.546,228.648 h1.52 r180; Top Overlay "IN" at 262.242,221.237 h1.52 r180